# EAGLE board Downloader 1.3 (EAGLE 7.3.0)
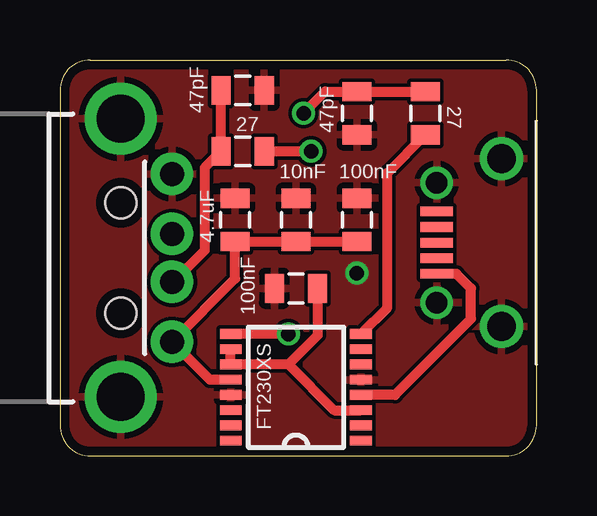
[diagram p0: board, top side]
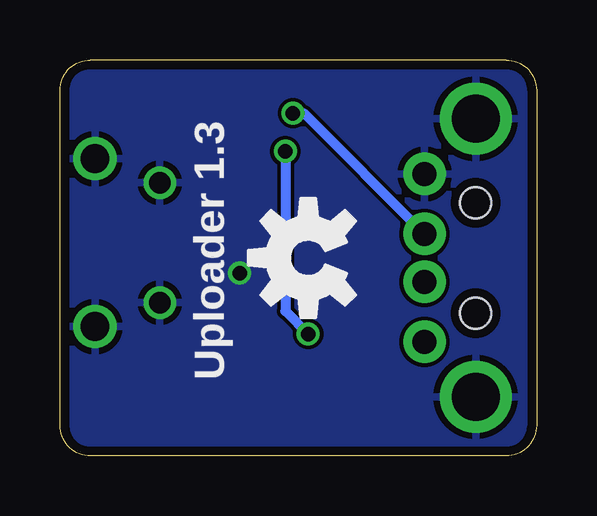
[diagram p1: board, bottom side, seen from below]

Size 19.88 x 16.51 mm. Coordinates in mm from the lower left corner, seen from the top.
Outline: 1.27,0 18.61,0 arc90 19.88,1.27 19.88,15.24 arc90 18.61,16.51 1.27,16.51 arc90 0,15.24 0,1.27 arc90 1.27,0
Copper layers (1*16): Top 0.0356mm / dielectric 1.5011mm / Bottom 0.0356mm
Design rules "LaenPCBOrder": minimum track width 6mil, minimum drill 13mil, track to track 6mil, track to pad 6mil, pad to pad 6mil, via to via 6mil, smd to smd 6mil, copper to edge 15mil, drill to drill 6mil, minimum pad ring 7mil, minimum via ring 7mil, stop-mask expansion 3mil, vias tented up to drill 0mil, thermal gap 10mil

## Footprints (pad centres in the part's own frame; a part is rotated, then mirrored left to right if it is on the bottom)
0805 = smd 0.8 x 1.2: 1 -0.9,0; 2 0.9,0
SSOP16 = smd 0.914 x 0.406: 1 -2.718,2.223; 2 -2.718,1.587; 3 -2.718,0.953; 4 -2.718,0.318; 5 -2.718,-0.318; 6 -2.718,-0.953; 7 -2.718,-1.587; 8 -2.718,-2.223; 9 2.718,-2.223; 10 2.718,-1.587; 11 2.718,-0.953; 12 2.718,-0.318; 13 2.718,0.318; 14 2.718,0.953; 15 2.718,1.587; 16 2.718,2.223
USB-A-H = drill 1 pad 1.778: D+ 2.13,1; D- 2.13,-1; GND 2.13,3.5; VBUS 2.13,-3.5 | drill 2: GND2 0,-5.8; GND3 0,5.8 | hole 1.3: 0,2.3; 0,-2.3
USB_HORZ_REINFORCED_MICRO = drill 1.2: G1 -3.5,0; G2 3.5,0 | smd 0.4 x 1.35: P1 -1.3,2.7; P2 -0.65,2.7; P3 0,2.7; P4 0.65,2.7; P5 1.3,2.7 | drill 0.9: P$1 -2.5,2.7; P$2 2.5,2.7

## Placement (x,y rotation side)
C1  100nF  [0805]  12.38,9.84 270 top
C3  10nF  [0805]  9.84,9.84 270 top
C4  4.7uF  [0805]  7.3,9.84 270 top
C7  47pF  [0805]  7.62,15.24 0 top
C8  47pF  [0805]  12.38,14.29 90 top
C10  100nF  [0805]  9.84,6.99 0 top
IC1  FT230XS  [SSOP16]  9.84,2.86 180 top
JP1  USB-A-H  [USB-A-H]  2.54,8.26 0 top
R1  27  [0805]  7.62,12.7 180 top
R2  27  [0805]  15.24,14.29 90 top
U$1  USB_SOCKET_MICRO_VERTREINFORCED  [USB_HORZ_REINFORCED_MICRO]  18.41,8.89 90 top
U$2  [OSHW-LOGO-M]  9.53,8.26 90 bottom

## Library data of the parts
C1 C3 C4 C7 C8 C10 = SparkFun-Passives
IC1 = ftdichip
JP1 R1 R2 U$1 = Andy-library
U$2 = SparkFun-Aesthetics

## Nets
5VDC: C1.2 C3.2 C4.2 IC1.12 JP1.VBUS
84_TX: IC1.4 U$1.P1
D+: C8.2 JP1.D+ R2.2
GND: C1.1 C3.1 C4.1 C7.2 C8.1 C10.1 IC1.5 IC1.13 JP1.GND JP1.GND2 JP1.GND3 U$1.G1 U$1.G2 U$1.P$1 U$1.P$2
N$1: C7.1 JP1.D- R1.2
N$13: IC1.9 R1.1
N$16: C10.2 IC1.3 IC1.10 IC1.11
N$18: IC1.8 R2.1

## Tracks (layer width: path | path; a pad name or v marks a point on that pad's centre or on a via)
5VDC
  Top 0.406: C1.2 C3.2 C4.2 7.3,7.39 JP1.VBUS 6.25,3.17 IC1.12
84_TX
  Top 0.406: IC1.4 13.97,2.54 17.14,5.71 17.14,6.99 16.54,7.59 U$1.P1
D+  (via drill 0.6)
  Top 0.406: v10.16,14.29 11.06,15.19 C8.2 R2.2
  Bottom 0.406: JP1.D+ 9.7,14.29 v10.16,14.29
GND  (via drill 0.6)
  other vias: 12.38,7.62
  pour Bottom: -0.64,16.51 21.15,16.51 21.15,0 -0.64,0
  pour Top: -0.64,16.51 21.15,16.51 21.15,0 -0.64,0
N$1
  Top 0.406: C7.1 R1.2 6.03,12.01 6.03,8.57 4.71,7.25 JP1.D-
N$13  (via drill 0.6)
  Top 0.406: R1.1 v10.48,12.7 | v9.53,5.08 IC1.9
  Bottom 0.406: v10.48,12.7 10.48,6.03 v9.53,5.08
N$16
  Top 0.406: IC1.10 IC1.11 9.53,3.81 | 9.53,3.81 11.43,1.91 IC1.3 | C10.2 10.74,5.03 9.53,3.81
N$18
  Top 0.406: IC1.8 13.65,6.17 13.65,11.8 R2.1

## Text on the board
bNames: Uploader 1.3